# EAGLE board 190_Final.preroute_lpkf (EAGLE 7.2.0)
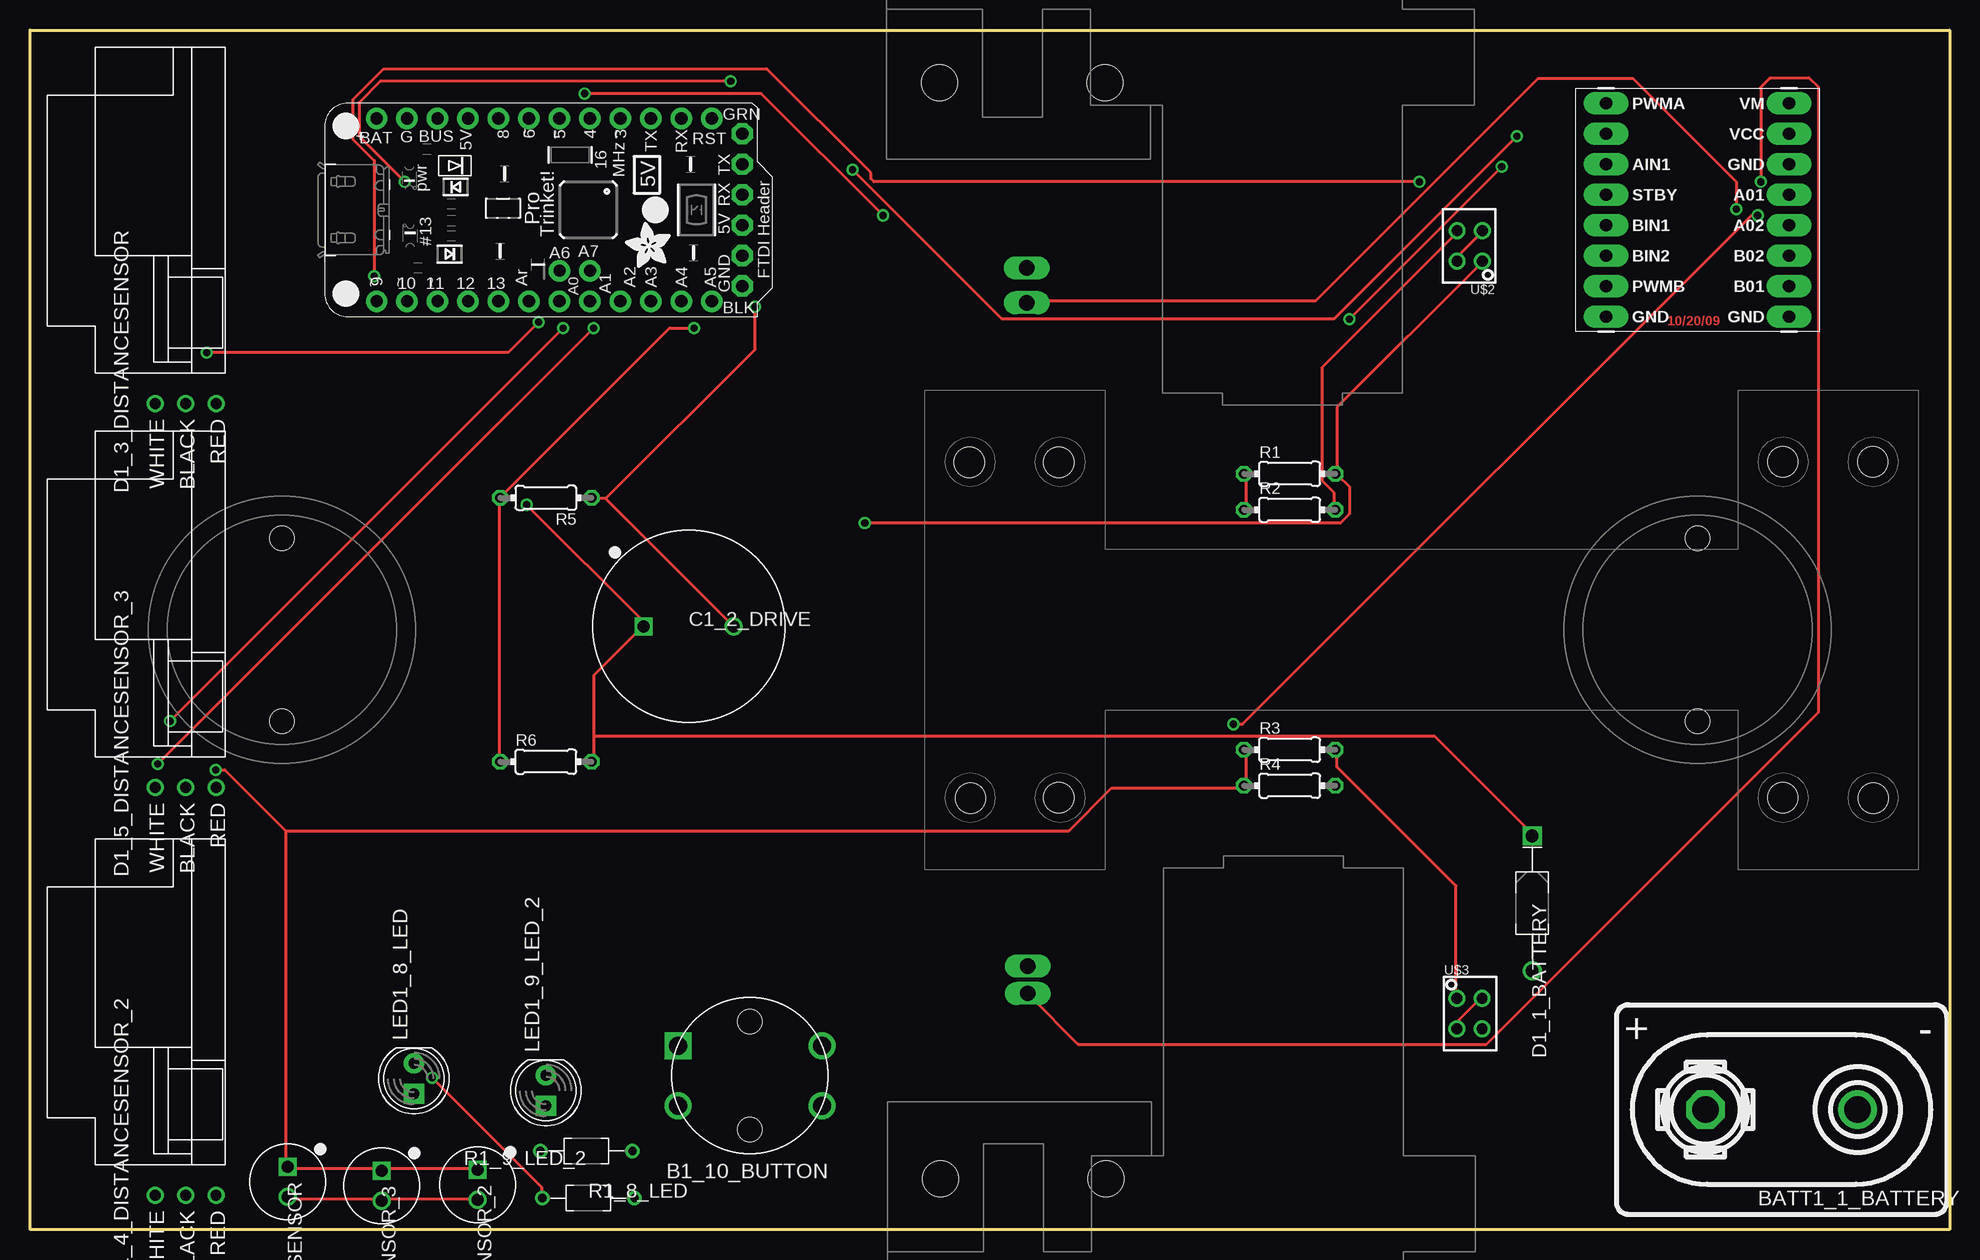
[diagram p0: board, top side]
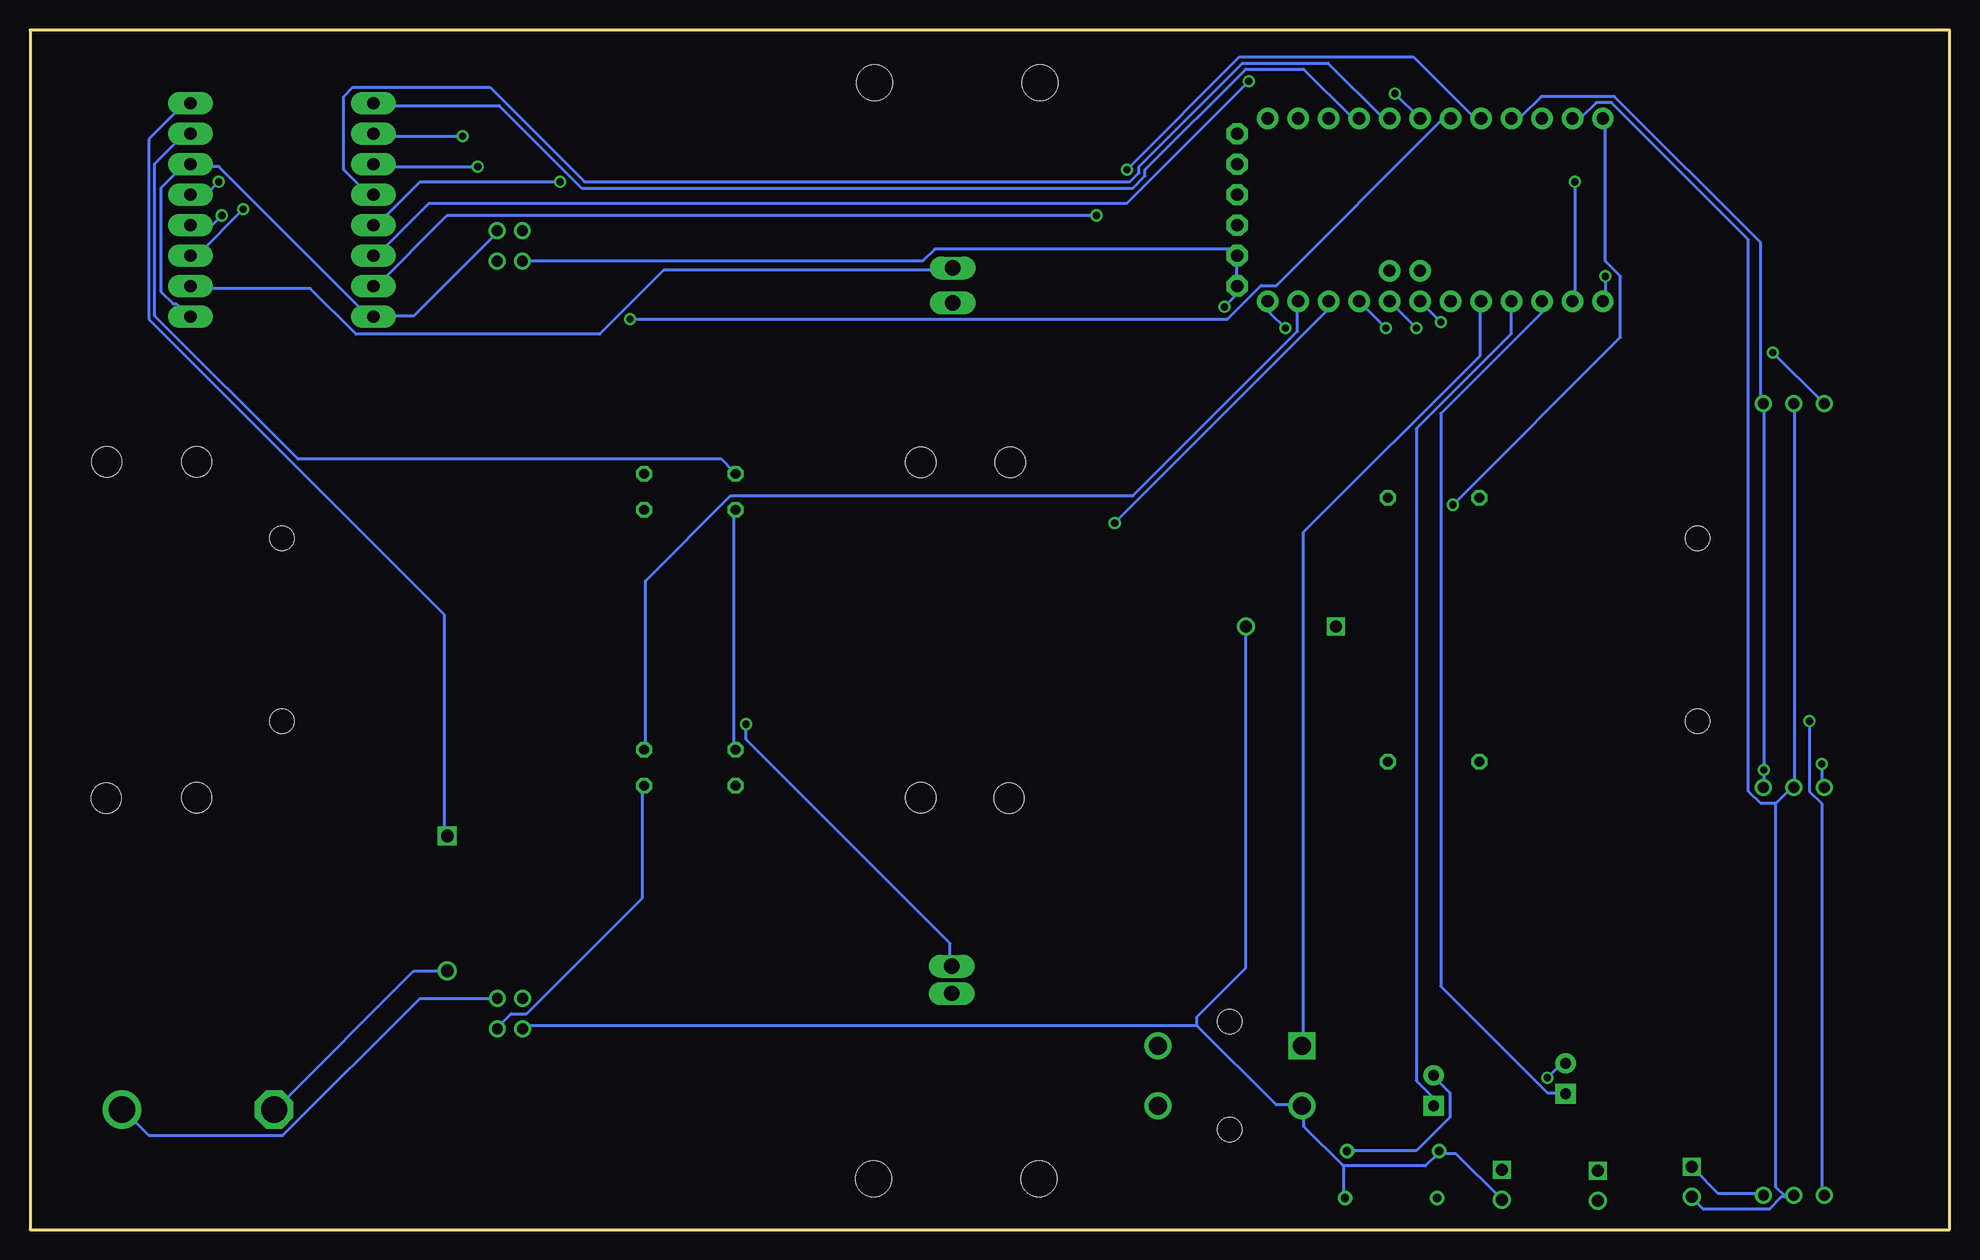
[diagram p1: board, bottom side, seen from below]

Size 160 x 100 mm. Coordinates in mm from the lower left corner, seen from the top.
Outline: 0,0 0,100 160,100 160,0 0,0
Copper layers (1*16): Top 0.035mm / dielectric 1.5mm / Bottom 0.035mm
Design rules "default *": minimum track width 10mil, minimum drill 0.6mm, track to track 10mil, track to pad 10mil, pad to pad 10mil, via to via 10mil, smd to smd 8mil, copper to edge 40mil, drill to drill 15mil, minimum pad ring 10mil, minimum via ring 8mil, stop-mask expansion 4mil, vias tented up to drill 0mil, thermal gap 10mil
tRestrict: area 27.8,91 to 30,94; area 30.2,91 to 32.5,94; area 32.8,91 to 35,94; area 35.2,91 to 37.5,94; area 38,91 to 40.2,94; area 40.5,91 to 42.8,94; area 43,91 to 45.2,94; area 45.5,91 to 47.8,94; area 48,91 to 50.2,94; area 50.5,91 to 52.8,94; area 53,91 to 55.2,94; area 55.8,91 to 58,94; 28 more areas

## Footprints (pad centres in the part's own frame; a part is rotated, then mirrored left to right if it is on the bottom)
BUTTON-TACTILE-ROUND-ADAFRUIT1009 = drill 1.5 square: P -6,2.5 | drill 1.5: P2 6,2.5; S -6,-2.5; S2 6,-2.5 | hole 2: 0,-4.5; 0,4.5
BATTERY_9V_KEYSTONE_968 = drill 2.2: N 6.35,0 | drill 2.2 octagon: P -6.35,0
CAPPRD750W80D1600H2200P = drill 1 pad 1.5 square: 1 -3.75,0 | drill 1 pad 1.5: 2 3.75,0
CAPPRD250W80D630H1220P = drill 1 pad 1.5 square: 1 -1.25,0 | drill 1 pad 1.5: 2 1.25,0
DIOAD1125W78L520D270_HS = drill 1.06 pad 1.59: A 5.625,0 | drill 1.06 pad 1.59 square: C -5.625,0
ANALOG_DISTANCE_SENSOR_GLUE_MOUNT = drill 0.9: GND -2.54,0.508; VCC -2.54,-2.032; VO -2.54,3.048
SPARKFUN_DUAL_MOTOR_DRIVER = drill 1.016 pad 1.88 long: A01 7.62,1.27; A02 7.62,-1.27; AIN1 -7.62,3.81; AIN2 -7.62,6.35; B01 7.62,-6.35; B02 7.62,-3.81; BIN1 -7.62,-1.27; BIN2 -7.62,-3.81; GND -7.62,-8.89; GND1 7.62,3.81; GND2 7.62,-8.89; PWMA -7.62,8.89; PWMB -7.62,-6.35; STBY -7.62,1.27; VCC 7.62,6.35; VM 7.62,8.89
SOLARBOTICS_G2_LEFT = drill 1.27 long: + -40.545,-3.68; - -43.45,-3.68 | hole 3: -25.1,-10.2; -25.1,3.6
LED5MM = drill 0.9 pad 1.676 square: A -1.27,0 | drill 0.9 pad 1.676: K 1.27,0
0204/7 = drill 0.813 octagon: 1 -3.81,0; 2 3.81,0
RESAD770W45L370D210_HS = drill 0.7 pad 1.1: 1 -3.85,0; 2 3.85,0
SOLARBOTICS_G2 = drill 1.27 long: + 40.545,-3.68; - 42.815,-3.68 | hole 3: 25.1,-10.2; 25.1,3.6
ADAFRUIT-PRO-TRINKET-5V = drill 1.016 pad 1.778: +5V 7.62,24.13; A0 -7.62,16.51; A1 -7.62,13.97; A2 -7.62,11.43; A3 -7.62,8.89; A4 -7.62,6.35; A5 -7.62,3.81; AREF -7.62,19.05; D3 7.62,11.43; D4 7.62,13.97; D5 7.62,16.51; D6 7.62,19.05; D8 7.62,21.59; D9 -7.62,31.75; D10 -7.62,29.21; D11 -7.62,26.67; D12 -7.62,24.13; D13 -7.62,21.59; GND2 7.62,29.21; RESET 7.62,3.81; RXD1 7.62,6.35; TXD1 7.62,8.89; VBAT 7.62,31.75; VBUS1 7.62,26.67 | drill 1 pad 1.778: A6 -5.08,16.51; A7 -5.08,13.97 | drill 1.016 pad 1.778 octagon: DTR/RTS 6.35,1.27; GND -6.35,1.27; GND1 -3.81,1.27; RXD 1.27,1.27; TXD 3.81,1.27; VBUS -1.27,1.27
ADAFRUIT-3/4IN-CASTER = hole 2: -7.62,0; 7.62,0
PHONE_STAND = hole 2.5: -37.7,13.95; -30.25,13.95; -37.6,-14.05; -30.25,-14; 30.1,14; 37.6,14; 30.1,-14; 37.65,-14.05
QRD1114 = drill 0.9: 1 -1.067,1.27; 2 -1.067,-1.27; 3 1.041,-1.27; 4 1.041,1.27

## Placement (x,y rotation side)
B1_10_BUTTON  BUTTON-TACTILE-ROUND  [BUTTON-TACTILE-ROUND-ADAFRUIT1009]  60,12.83 0 top
BATT1_1_BATTERY  BATTERY-9V-VERTICAL  [BATTERY_9V_KEYSTONE_968]  146,10 0 top
C1_2_DRIVE  3300uF  [CAPPRD750W80D1600H2200P]  54.9,50.28 0 top
C1_3_DISTANCESENSOR  100uF  [CAPPRD250W80D630H1220P]  21.49,3.97 270 top
C1_4_DISTANCESENSOR_2  100uF  [CAPPRD250W80D630H1220P]  37.3,3.73 270 top
C1_5_DISTANCESENSOR_3  100uF  [CAPPRD250W80D630H1220P]  29.32,3.65 270 top
D1_1_BATTERY  [DIOAD1125W78L520D270_HS]  125.21,27.19 270 top
D1_3_DISTANCESENSOR  ANALOG_DISTANCE_SENSOR-GLUE  [ANALOG_DISTANCE_SENSOR_GLUE_MOUNT]  13.48,71.39 90 top
D1_4_DISTANCESENSOR_2  ANALOG_DISTANCE_SENSOR-GLUE  [ANALOG_DISTANCE_SENSOR_GLUE_MOUNT]  13.48,5.39 90 top
D1_5_DISTANCESENSOR_3  ANALOG_DISTANCE_SENSOR-GLUE  [ANALOG_DISTANCE_SENSOR_GLUE_MOUNT]  13.48,39.39 90 top
DRVR_2_DRIVE  SPARKFUN_DUAL_MOTOR_DRIVER-BOB  [SPARKFUN_DUAL_MOTOR_DRIVER]  139,85 0 top
L_2_DRIVE  SOLARBOTICS_GM2_LEFT  [SOLARBOTICS_G2_LEFT]  79.41,120.71 90 top
LED1_8_LED  [LED5MM]  32,12.58 90 top
LED1_9_LED_2  [LED5MM]  43,11.58 90 top
R1  [0204/7]  105,63 0 top
R1_8_LED  330  [RESAD770W45L370D210_HS]  46.54,2.62 0 top
R1_9_LED_2  330  [RESAD770W45L370D210_HS]  46.38,6.54 180 top
R2  [0204/7]  105,60 0 top
R3  [0204/7]  105,40 0 top
R4  [0204/7]  105,37 0 top
R5  [0204/7]  43,61 180 top
R6  [0204/7]  43,39 0 top
R_2_DRIVE  SOLARBOTICS_GM2  [SOLARBOTICS_G2]  79.49,-20.86 90 top
U1_0_BRAIN  ADAFRUIT-PRO-TRINKET-5V-BOB  [ADAFRUIT-PRO-TRINKET-5V]  60.64,85 90 top
U1_6_CASTER  CASTERADAFRUIT-3/4IN  [ADAFRUIT-3/4IN-CASTER]  21,50 90 top
U1_7_CASTER_2  CASTERADAFRUIT-3/4IN  [ADAFRUIT-3/4IN-CASTER]  139,50 90 top
U$1  [PHONE_STAND]  116,50 0 top
U$2  QRD1114  [QRD1114]  120,82 180 top
U$3  QRD1114  [QRD1114]  120,18 0 top

## Library data of the parts
B1_10_BUTTON = Components; DIST: Adafruit; DISTPN: 1009; HIERARCHY_NAME: button.B1
BATT1_1_BATTERY = Components; HIERARCHY_NAME: battery.BATT1
C1_2_DRIVE = KoalaBuild; DATASHEET: http://industrial.panasonic.com/www-cgi/jvcr13pz.cgi?E+PZ+3+ABA0012+ECA1EM332+7+WW; DATA_SHEET: http://industrial.panasonic.com/www-cgi/jvcr13pz.cgi?E+PZ+3+ABA0012+ECA1EM332+7+WW; DB: /home/michael/gtron_devel/Gadgets/Tools/Koala/Koala/PartLibrary/Digikey/Capacitors-AluminumTH.csv; DEVICE: TH-RADIAL_ALUMINUM_16MM; DIST: Digikey; DISTPN: P5158-ND; HIERARCHY_NAME: drive.C1; IMAGE: http://media.digikey.com/Photos/Panasonic%20Photos/ECA-1CM472.jpg; MFR: Panasonic Electronic Components; MIN_QTY: 1; MPN: ECA-1EM332; PACKAGE: CAPPRD750W80D1600H2200P; PRICE: $1.13; SIZE: TH; STOCK: STOCK; TOL: 20%; VALUE_QUERY: >3000uF; VOLTS: ( >= 5)V
C1_3_DISTANCESENSOR = KoalaBuild; DATASHEET: http://industrial.panasonic.com/www-cgi/jvcr13pz.cgi?E+PZ+3+ABA0012+ECA1EM101+7+WW; DATA_SHEET: http://industrial.panasonic.com/www-cgi/jvcr13pz.cgi?E+PZ+3+ABA0012+ECA1EM101+7+WW; DB: /home/michael/gtron_devel/Gadgets/Tools/Koala/Koala/PartLibrary/Digikey/Capacitors-AluminumTH.csv; DEVICE: TH-RADIAL_ALUMINUM_6.3MM; DIST: Digikey; DISTPN: P5152-ND; HIERARCHY_NAME: distanceSensor.C1; IMAGE: http://media.digikey.com/Photos/Panasonic%20Photos/ECA-1EM101B.JPG; MFR: Panasonic Electronic Components; MIN_QTY: 1; MPN: ECA-1EM101; PACKAGE: CAPPRD250W80D630H1220P; PRICE: $0.25; SIZE: TH; STOCK: STOCK; TOL: 20%; VALUE_QUERY: >10uF; VOLTS: ( >= 5)V
C1_4_DISTANCESENSOR_2 = KoalaBuild; DATASHEET: http://industrial.panasonic.com/www-cgi/jvcr13pz.cgi?E+PZ+3+ABA0012+ECA1EM101+7+WW; DATA_SHEET: http://industrial.panasonic.com/www-cgi/jvcr13pz.cgi?E+PZ+3+ABA0012+ECA1EM101+7+WW; DB: /home/michael/gtron_devel/Gadgets/Tools/Koala/Koala/PartLibrary/Digikey/Capacitors-AluminumTH.csv; DEVICE: TH-RADIAL_ALUMINUM_6.3MM; DIST: Digikey; DISTPN: P5152-ND; HIERARCHY_NAME: distanceSensor_2.C1; IMAGE: http://media.digikey.com/Photos/Panasonic%20Photos/ECA-1EM101B.JPG; MFR: Panasonic Electronic Components; MIN_QTY: 1; MPN: ECA-1EM101; PACKAGE: CAPPRD250W80D630H1220P; PRICE: $0.25; SIZE: TH; STOCK: STOCK; TOL: 20%; VALUE_QUERY: >10uF; VOLTS: ( >= 5)V
C1_5_DISTANCESENSOR_3 = KoalaBuild; DATASHEET: http://industrial.panasonic.com/www-cgi/jvcr13pz.cgi?E+PZ+3+ABA0012+ECA1EM101+7+WW; DATA_SHEET: http://industrial.panasonic.com/www-cgi/jvcr13pz.cgi?E+PZ+3+ABA0012+ECA1EM101+7+WW; DB: /home/michael/gtron_devel/Gadgets/Tools/Koala/Koala/PartLibrary/Digikey/Capacitors-AluminumTH.csv; DEVICE: TH-RADIAL_ALUMINUM_6.3MM; DIST: Digikey; DISTPN: P5152-ND; HIERARCHY_NAME: distanceSensor_3.C1; IMAGE: http://media.digikey.com/Photos/Panasonic%20Photos/ECA-1EM101B.JPG; MFR: Panasonic Electronic Components; MIN_QTY: 1; MPN: ECA-1EM101; PACKAGE: CAPPRD250W80D630H1220P; PRICE: $0.25; SIZE: TH; STOCK: STOCK; TOL: 20%; VALUE_QUERY: >10uF; VOLTS: ( >= 5)V
D1_1_BATTERY = KoalaBuild; DATASHEET: http://www.st.com/web/en/resource/technical/document/datasheet/CD00001625.pdf; DATA_SHEET: http://www.st.com/web/en/resource/technical/document/datasheet/CD00001625.pdf; DB: /home/michael/gtron_devel/Gadgets/Tools/Koala/Koala/PartLibrary/Digikey/Schottky-Diodes-TH.csv; DEVICE: TH-DO-41-AND-DO-204AL; DIST: Digikey; DISTPN: 497-4547-1-ND; HIERARCHY_NAME: battery.D1; IMAGE: http://media.digikey.com/photos/STMicro%20Photos/1N5819.JPG; IRECT: 1A; MFR: STMicroelectronics; MIN_QTY: 1; MPN: 1N5817; PACKAGE: DIOAD1125W78L520D270_HS; PRICE: $0.57; SIZE: TH; STOCK: STOCK; VALUE: 450mV; VREV: 20V
D1_3_DISTANCESENSOR = Components; DIST: Pololu; DISTPN: 2450; HIERARCHY_NAME: distanceSensor.D1
D1_4_DISTANCESENSOR_2 = Components; DIST: Pololu; DISTPN: 2450; HIERARCHY_NAME: distanceSensor_2.D1
D1_5_DISTANCESENSOR_3 = Components; DIST: Pololu; DISTPN: 2450; HIERARCHY_NAME: distanceSensor_3.D1
DRVR_2_DRIVE = BOBs; DIST: Sparkfun; DISTPN: 9457; HIERARCHY_NAME: drive.DRVR
L_2_DRIVE = Components; DIST: Solarbotics; DISTPN: gm2; HIERARCHY_NAME: drive.L
LED1_8_LED = Components; DIST: Adafruit; DISTPN: 298; HIERARCHY_NAME: led.LED1
LED1_9_LED_2 = Components; DIST: Adafruit; DISTPN: 298; HIERARCHY_NAME: led_2.LED1
R1-R6 = resistor
R1_8_LED = KoalaBuild; CASE: TH; DATASHEET: http://www.yageo.com/NewPortal/yageodocoutput?fileName=/pdf/throughhole/Yageo_LR_CFR_2013.pdf; DATA_SHEET: http://www.yageo.com/NewPortal/yageodocoutput?fileName=/pdf/throughhole/Yageo_LR_CFR_2013.pdf; DB: /home/michael/gtron_devel/Gadgets/Tools/Koala/Koala/PartLibrary/Digikey/Resistors-TH.csv; DEVICE: TH-1/6W-CARBON; DIST: Digikey; DISTPN: 330EBK-ND; HIERARCHY_NAME: led.R1; IMAGE: http://media.digikey.com/Renders/Yageo%20Renders/CFR-12JR-330R.jpg; MFR: Yageo; MIN_QTY: 1; MPN: CFR-12JB-52-330R; PACKAGE: RESAD770W45L370D210_HS; PRICE: $0.10; PWR: 167mW; SIZE: TH; STOCK: STOCK; TOL: 5%; VALUE_QUERY: 330
R1_9_LED_2 = KoalaBuild; CASE: TH; DATASHEET: http://www.yageo.com/NewPortal/yageodocoutput?fileName=/pdf/throughhole/Yageo_LR_CFR_2013.pdf; DATA_SHEET: http://www.yageo.com/NewPortal/yageodocoutput?fileName=/pdf/throughhole/Yageo_LR_CFR_2013.pdf; DB: /home/michael/gtron_devel/Gadgets/Tools/Koala/Koala/PartLibrary/Digikey/Resistors-TH.csv; DEVICE: TH-1/6W-CARBON; DIST: Digikey; DISTPN: 330EBK-ND; HIERARCHY_NAME: led_2.R1; IMAGE: http://media.digikey.com/Renders/Yageo%20Renders/CFR-12JR-330R.jpg; MFR: Yageo; MIN_QTY: 1; MPN: CFR-12JB-52-330R; PACKAGE: RESAD770W45L370D210_HS; PRICE: $0.10; PWR: 167mW; SIZE: TH; STOCK: STOCK; TOL: 5%; VALUE_QUERY: 330
R_2_DRIVE = Components; DIST: Solarbotics; DISTPN: gm2; HIERARCHY_NAME: drive.R
U1_0_BRAIN = BOBs; DIST: Adafruit; DISTPN: 2000; HIERARCHY_NAME: brain.U1
U1_6_CASTER = Components; DIST: Adafruit; DISTPN: 1200; HIERARCHY_NAME: caster.u1
U1_7_CASTER_2 = Components; DIST: Adafruit; DISTPN: 1200; HIERARCHY_NAME: caster_2.u1
U$1 = 3DPrintedParts
U$2 U$3 = SparkFun-Sensors

## Nets
+5V_0_BRAIN: C1_3_DISTANCESENSOR.1 C1_4_DISTANCESENSOR_2.1 C1_5_DISTANCESENSOR_3.1 D1_3_DISTANCESENSOR.VCC D1_4_DISTANCESENSOR_2.VCC D1_5_DISTANCESENSOR_3.VCC DRVR_2_DRIVE.VCC R1.1 R2.1 R3.1 R4.1 U1_0_BRAIN.+5V
A0_0_BRAIN: D1_3_DISTANCESENSOR.VO U1_0_BRAIN.A0
A1_0_BRAIN: D1_4_DISTANCESENSOR_2.VO U1_0_BRAIN.A1
A01_2_DRIVE: DRVR_2_DRIVE.A01 R_2_DRIVE.+
A2_0_BRAIN: D1_5_DISTANCESENSOR_3.VO U1_0_BRAIN.A2
A02_2_DRIVE: DRVR_2_DRIVE.A02 R_2_DRIVE.-
A3_0_BRAIN: R1.2 U1_0_BRAIN.A3 U$2.1
A4_0_BRAIN: R3.2 U1_0_BRAIN.A4 U$3.1
A5_0_BRAIN: R5.2 R6.1 U1_0_BRAIN.A5
A6_0_BRAIN: U1_0_BRAIN.A6
A7_0_BRAIN: U1_0_BRAIN.A7
AREF_0_BRAIN: U1_0_BRAIN.AREF
B01_2_DRIVE: DRVR_2_DRIVE.B01 L_2_DRIVE.+
B02_2_DRIVE: DRVR_2_DRIVE.B02 L_2_DRIVE.-
D3_0_BRAIN: DRVR_2_DRIVE.PWMA U1_0_BRAIN.D3
D4_0_BRAIN: DRVR_2_DRIVE.STBY U1_0_BRAIN.D4
D5_0_BRAIN: DRVR_2_DRIVE.PWMB U1_0_BRAIN.D5
D6_0_BRAIN: DRVR_2_DRIVE.AIN1 U1_0_BRAIN.D6
D8_0_BRAIN: DRVR_2_DRIVE.AIN2 U1_0_BRAIN.D8
D9_0_BRAIN: DRVR_2_DRIVE.BIN1 U1_0_BRAIN.D9
D10_0_BRAIN: DRVR_2_DRIVE.BIN2 U1_0_BRAIN.D10
D11_0_BRAIN: LED1_8_LED.A U1_0_BRAIN.D11
D12_0_BRAIN: LED1_9_LED_2.A U1_0_BRAIN.D12
D13_0_BRAIN: B1_10_BUTTON.P U1_0_BRAIN.D13
DTR/RTS_0_BRAIN: U1_0_BRAIN.DTR/RTS
GND_0_BRAIN: B1_10_BUTTON.S BATT1_1_BATTERY.N C1_2_DRIVE.2 C1_3_DISTANCESENSOR.2 C1_4_DISTANCESENSOR_2.2 C1_5_DISTANCESENSOR_3.2 D1_3_DISTANCESENSOR.GND D1_4_DISTANCESENSOR_2.GND D1_5_DISTANCESENSOR_3.GND DRVR_2_DRIVE.GND DRVR_2_DRIVE.GND1 DRVR_2_DRIVE.GND2 R1_8_LED.2 R1_9_LED_2.2 R5.1 U1_0_BRAIN.GND U1_0_BRAIN.GND1 U1_0_BRAIN.GND2 U$2.2 U$2.4 U$3.2 U$3.4
N$1_1_BATTERY: BATT1_1_BATTERY.P D1_1_BATTERY.A
N$1_8_LED: LED1_8_LED.K R1_8_LED.1
N$1_9_LED_2: LED1_9_LED_2.K R1_9_LED_2.1
N$5: R2.2 U$2.3
N$7: R4.2 U$3.3
POS_1_BATTERY: C1_2_DRIVE.1 D1_1_BATTERY.C DRVR_2_DRIVE.VM R6.2 U1_0_BRAIN.VBAT
RESET_0_BRAIN: U1_0_BRAIN.RESET
RXD1_0_BRAIN: U1_0_BRAIN.RXD1
RXD_0_BRAIN: U1_0_BRAIN.RXD
TXD1_0_BRAIN: U1_0_BRAIN.TXD1
TXD_0_BRAIN: U1_0_BRAIN.TXD
VBUS1_0_BRAIN: U1_0_BRAIN.VBUS1
VBUS_0_BRAIN: U1_0_BRAIN.VBUS

## Tracks (layer width: path | path; a pad name or v marks a point on that pad's centre or on a via)
+5V_0_BRAIN  (via drill 0.6)
  Top 0.254: R3.1 101.34,39.84 101.34,37.05 R4.1 101.08,36.79 90.16,36.79 86.6,33.24 21.33,33.24 | R2.1 101.34,60.16 101.34,62.95 R1.1 | C1_4_DISTANCESENSOR_2.1 37.07,5.04 29.45,5.04 C1_5_DISTANCESENSOR_3.1 29.2,5.04 21.58,5.04 C1_3_DISTANCESENSOR.1 21.33,5.3 21.33,33.24 | 21.33,33.24 16.25,38.32 v15.48,38.32
  Bottom 0.254: R3.1 101.34,40.09 101.34,59.91 R2.1 | DRVR_2_DRIVE.VCC 146.8,91.15 147.31,91.15 149.6,88.86 149.6,76.16 137.66,64.22 102.35,64.22 101.34,63.21 R1.1 | D1_4_DISTANCESENSOR_2.VCC 15.74,3.01 19.29,3.01 21.33,5.04 C1_3_DISTANCESENSOR.1 | D1_5_DISTANCESENSOR_3.VCC 15.48,37.05 v15.48,38.32 15.48,68.8 D1_3_DISTANCESENSOR.VCC 15.74,69.05 15.74,82.26 27.93,94.45 34.03,94.45 35.8,92.67 36.31,92.67 U1_0_BRAIN.+5V
A0_0_BRAIN  (via drill 0.6)
  Top 0.254: v14.72,73.11 39.87,73.11 v42.41,75.65
  Bottom 0.254: v14.72,73.11 10.66,69.05 D1_3_DISTANCESENSOR.VO | v42.41,75.65 43.93,77.18 U1_0_BRAIN.A0
A1_0_BRAIN  (via drill 0.6)
  Top 0.254: v44.44,75.15 v11.67,42.38
  Bottom 0.254: v11.67,42.38 11.67,36.54 10.66,35.52 10.66,3.01 D1_4_DISTANCESENSOR_2.VO | v44.44,75.15 46.47,77.18 U1_0_BRAIN.A1
A01_2_DRIVE  (via drill 0.6)
  Top 0.254: v144.26,87.34 144.26,95.21 145.02,95.97 148.33,95.97 149.09,95.21 149.09,43.14 121.4,15.46 87.37,15.46 83.3,19.52 R_2_DRIVE.+
  Bottom 0.254: v144.26,87.34 145.28,86.32 146.55,86.32 DRVR_2_DRIVE.A01
A2_0_BRAIN  (via drill 0.6)
  Top 0.254: v46.98,75.15 v10.66,38.82
  Bottom 0.254: v10.66,38.82 10.66,37.05 D1_5_DISTANCESENSOR_3.VO | v46.98,75.15 49.01,77.18 U1_0_BRAIN.A2
A02_2_DRIVE  (via drill 0.6)
  Top 0.254: v144.01,84.54 143.5,84.54 101.08,42.13 v100.32,42.13
  Bottom 0.254: v144.01,84.54 144.77,83.78 146.55,83.78 DRVR_2_DRIVE.A02 | v100.32,42.13 100.32,40.86 83.3,23.84 83.3,22.06 R_2_DRIVE.-
A3_0_BRAIN  (via drill 0.6)
  Top 0.254: U$2.1 120.89,80.48 108.96,68.54 108.96,63.21 R1.2 108.96,62.95 109.97,61.94 109.97,59.65 109.21,58.89 v69.59,58.89
  Bottom 0.254: v69.59,58.89 51.81,76.67 51.81,77.18 U1_0_BRAIN.A3
A4_0_BRAIN
  Top 0.254: R3.2 108.96,39.84 108.96,38.57 118.86,28.66 118.86,19.52 U$3.1
  Bottom 0.254: U1_0_BRAIN.A4 54.35,77.18 54.35,74.89 68.06,61.18 101.59,61.18 108.7,54.06 108.7,40.09 R3.2
A5_0_BRAIN  (via drill 0.6)
  Top 0.254: R6.1 39.11,39.08 39.11,60.92 R5.2 39.36,61.18 53.33,75.15 v55.36,75.15
  Bottom 0.254: v55.36,75.15 56.63,76.42 56.63,77.18 U1_0_BRAIN.A5
B01_2_DRIVE
  Bottom 0.254: DRVR_2_DRIVE.B01 146.55,78.45 136.64,78.45 132.83,74.64 112.51,74.64 107.18,79.97 83.3,79.97 L_2_DRIVE.+
B02_2_DRIVE  (via drill 0.6)
  Top 0.254: v142.23,85.05 142.23,87.34 133.59,95.97 125.72,95.97 107.18,77.43 83.3,77.43 L_2_DRIVE.-
  Bottom 0.254: v142.23,85.05 146.04,81.24 146.55,81.24 DRVR_2_DRIVE.B02
D3_0_BRAIN
  Bottom 0.254: U1_0_BRAIN.D3 49.27,92.67 49.77,92.67 53.84,96.74 58.66,96.74 67.05,88.35 67.05,87.85 68.06,86.83 114.04,86.83 120.89,93.69 131.31,93.69 DRVR_2_DRIVE.PWMA
D4_0_BRAIN
  Bottom 0.254: U1_0_BRAIN.D4 46.73,92.67 47.23,92.67 51.81,97.24 58.92,97.24 67.55,88.61 67.55,88.1 68.32,87.34 113.78,87.34 121.66,95.21 133.09,95.21 133.85,94.45 133.85,88.35 131.56,86.07 DRVR_2_DRIVE.STBY
D5_0_BRAIN  (via drill 0.6)
  Top 0.254: v46.22,94.7 60.95,94.7 v71.11,84.54
  Bottom 0.254: v46.22,94.7 44.19,92.67 U1_0_BRAIN.D5 | v71.11,84.54 125.21,84.54 131.31,78.45 DRVR_2_DRIVE.PWMB
D6_0_BRAIN  (via drill 0.6)
  Top 0.254: v122.67,88.61 v109.97,75.91
  Bottom 0.254: v109.97,75.91 60.19,75.91 57.39,78.7 56.12,78.7 42.41,92.42 41.65,92.42 U1_0_BRAIN.D6 | v122.67,88.61 131.31,88.61 DRVR_2_DRIVE.AIN1
D8_0_BRAIN  (via drill 0.6)
  Top 0.254: v68.57,88.35 81.02,75.91 108.7,75.91 v123.94,91.15
  Bottom 0.254: v68.57,88.35 59.17,97.75 44.69,97.75 39.61,92.67 39.11,92.67 U1_0_BRAIN.D8 | v123.94,91.15 131.31,91.15 DRVR_2_DRIVE.AIN2
D9_0_BRAIN  (via drill 0.6)
  Top 0.254: v28.69,79.46 28.69,89.12 26.91,90.89 26.91,94.2 29.45,96.74 61.46,96.74 70.09,88.1 70.09,87.59 70.35,87.34 v115.81,87.34
  Bottom 0.254: v28.69,79.46 28.69,77.43 U1_0_BRAIN.D9 | v115.81,87.34 127.5,87.34 131.31,83.53 DRVR_2_DRIVE.BIN1
D10_0_BRAIN  (via drill 0.6)
  Top 0.254: v31.23,87.34 27.42,91.15 27.42,93.94 29.2,95.72 v58.41,95.72
  Bottom 0.254: v31.23,87.34 31.23,77.43 U1_0_BRAIN.D10 | v58.41,95.72 68.57,85.56 126.74,85.56 131.31,80.99 DRVR_2_DRIVE.BIN2
D11_0_BRAIN
  Bottom 0.254: LED1_8_LED.A 32.25,11.39 33.52,11.39 42.41,20.28 42.41,68.03 34.03,76.42 34.03,77.18 U1_0_BRAIN.D11
D12_0_BRAIN
  Bottom 0.254: LED1_9_LED_2.A 43.17,10.38 43.17,11.14 44.44,12.41 44.44,66.76 36.57,74.64 36.57,77.18 U1_0_BRAIN.D12
D13_0_BRAIN
  Bottom 0.254: U1_0_BRAIN.D13 39.11,77.18 39.11,72.86 53.84,58.13 53.84,15.46 B1_10_BUTTON.P
GND_0_BRAIN  (via drill 0.6)
  Top 0.254: U$2.4 119.12,80.73 119.12,81.24 120.89,83.02 U$2.2 | 48,60.92 46.98,60.92 R5.1 | 48,60.92 58.41,50.51 C1_2_DRIVE.2 | v60.44,76.92 60.44,73.37 48,60.92 | U$3.2 119.12,16.98 119.12,17.49 120.89,19.27 U$3.4 | C1_4_DISTANCESENSOR_2.2 37.07,2.5 29.45,2.5 C1_5_DISTANCESENSOR_3.2 29.2,2.5 21.58,2.5 C1_3_DISTANCESENSOR.2
  Bottom 0.254: DRVR_2_DRIVE.GND2 146.8,76.16 147.82,77.18 148.07,77.18 149.09,78.19 149.09,86.83 147.31,88.61 146.8,88.61 DRVR_2_DRIVE.GND1 146.55,88.61 144.26,88.61 131.56,75.91 DRVR_2_DRIVE.GND 131.31,76.16 128.01,76.16 121.15,83.02 U$2.2 | v60.44,76.92 59.43,77.94 59.43,78.45 U1_0_BRAIN.GND 59.43,78.7 59.43,80.99 U1_0_BRAIN.GND1 59.43,81.24 59.93,81.75 84.57,81.75 85.59,80.73 118.86,80.73 U$2.4 | D1_3_DISTANCESENSOR.GND 12.94,68.8 12.94,37.05 D1_5_DISTANCESENSOR_3.GND 13.2,36.79 14.47,35.52 | 14.47,35.52 15.74,35.52 16.75,36.54 16.75,82.51 28.18,93.94 29.45,93.94 30.72,92.67 31.23,92.67 U1_0_BRAIN.GND2 | U$3.4 121.15,19.27 127.5,19.27 138.93,7.84 150.1,7.84 152.14,9.87 BATT1_1_BATTERY.N | 50.54,5.3 50.54,2.76 R1_8_LED.2 | 50.54,5.3 53.84,8.6 53.84,10.12 B1_10_BUTTON.S 54.09,10.38 56.12,10.38 62.73,16.98 | 13.71,2.76 13.96,2.76 14.98,1.74 20.56,1.74 21.33,2.5 C1_3_DISTANCESENSOR.2 | 13.71,2.76 13.2,2.76 D1_4_DISTANCESENSOR_2.GND | C1_4_DISTANCESENSOR_2.2 37.33,2.5 41.14,6.31 42.41,6.31 R1_9_LED_2.2 42.66,6.31 43.68,5.3 50.54,5.3 | 62.73,16.98 118.86,16.98 U$3.2 | 14.47,35.52 14.47,3.52 13.71,2.76 | 62.73,16.98 62.73,17.74 58.66,21.81 58.66,50.25 C1_2_DRIVE.2
N$1_1_BATTERY
  Bottom 0.254: D1_1_BATTERY.A 125.47,21.55 128.01,21.55 139.44,10.12 BATT1_1_BATTERY.P
N$1_8_LED  (via drill 0.6)
  Top 0.254: v33.52,12.66 42.66,3.52 42.66,2.76 R1_8_LED.1
  Bottom 0.254: v33.52,12.66 32.25,13.93 LED1_8_LED.K
N$1_9_LED_2
  Bottom 0.254: R1_9_LED_2.1 50.03,6.57 44.44,6.57 41.65,9.36 41.65,11.39 42.92,12.66 LED1_9_LED_2.K
N$5
  Top 0.254: R2.2 108.7,60.16 108.7,61.43 107.69,62.45 107.69,71.84 118.86,83.02 U$2.3
N$7
  Bottom 0.254: R4.2 108.96,36.79 108.96,27.65 118.61,18 119.88,18 120.89,16.98 U$3.3
POS_1_BATTERY  (via drill 0.6)
  Top 0.254: 46.98,41.11 46.98,46.19 51.04,50.25 C1_2_DRIVE.1 51.3,50.51 v41.39,60.41 | 46.98,41.11 46.98,39.08 R6.2 | 46.98,41.11 117.08,41.11 125.21,32.98 D1_1_BATTERY.C
  Bottom 0.254: v41.39,60.41 27.42,74.38 27.42,79.46 28.69,80.73 28.69,92.42 U1_0_BRAIN.VBAT | D1_1_BATTERY.C 125.47,32.98 125.47,51.27 150.1,75.91 150.1,90.89 147.31,93.69 146.8,93.69 DRVR_2_DRIVE.VM